# Altium PCB LDO.PcbDoc
Units mm, origin at the board's own origin, x right, y up, seen from the top; angles counter-clockwise.
Board outline 23.49 x 9.53 mm, 2 copper layers (Top Layer, Bottom Layer); 3 components, 3 nets, 8 pads, 10 vias.
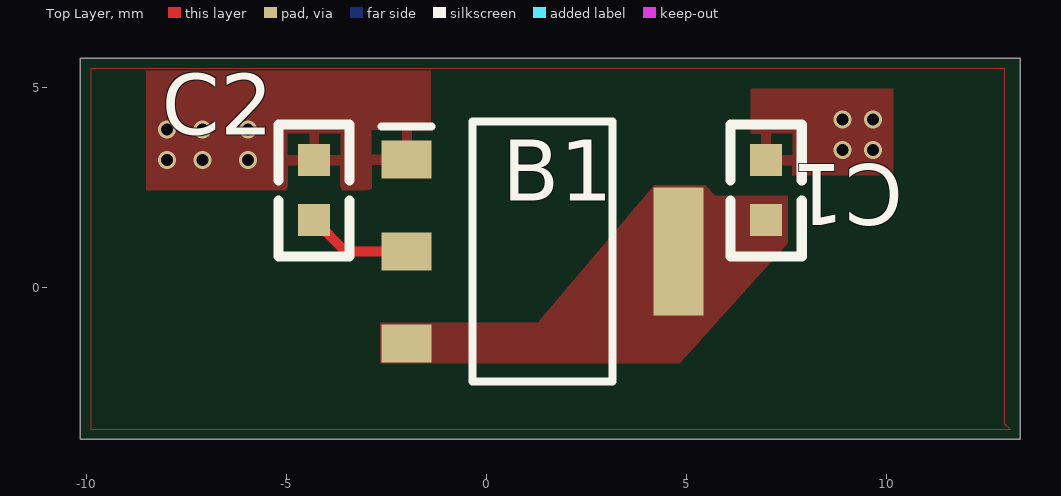
[diagram p0: Top Layer view]
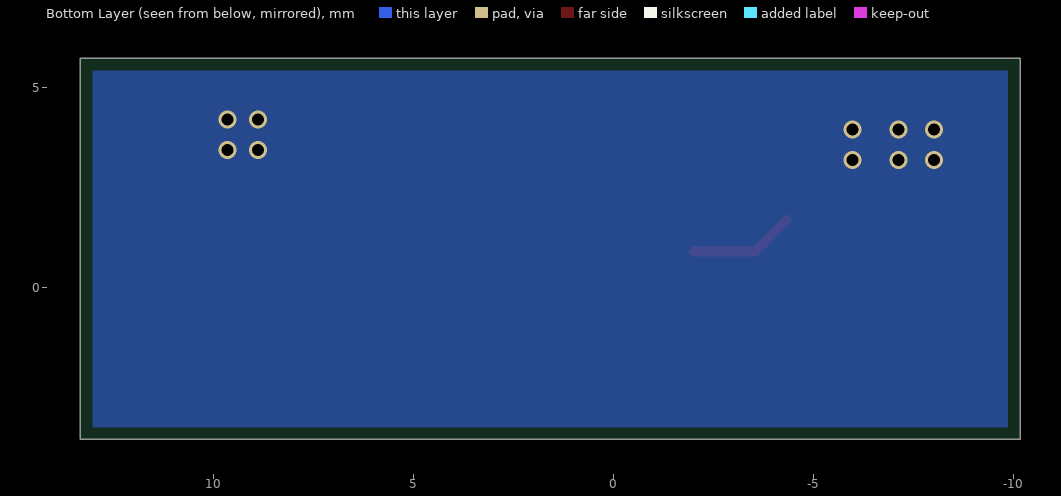
[diagram p1: Bottom Layer view, seen from below]

## Layer stack, top to bottom
Top Solder: solder mask 0.0102, Solder Resist, Dk 3.5
Top Layer: signal copper 0.0356
Dielectric 1: dielectric 0.32, FR-4, Dk 4.8
Bottom Layer: signal copper 0.0356
Bottom Solder: solder mask 0.0102, Solder Resist, Dk 3.5

## Board outline
-10.16,-3.81 -10.16,5.715 13.335,5.715 13.335,-3.81

## Design rules (kind name [scope] priority, off if disabled: settings)
BoardOutlineClearance [All] p1: gap=0.3 ignorepadtopadclearanceinfootprint=FALSE except(0: Arc-SplitContinuation Track-SplitContinuation SMDPad-SplitContinuation THPad-OutlineEdge THPad-CavityEdge THPad-CutoutEdge THPad-SplitBarrior THPad-SplitContinuation Via-OutlineEdge Via-CavityEdge Via-CutoutEdge Via-SplitBarrior Via-SplitContinuation Fill-SplitContinuation Poly-SplitContinuation Region-SplitContinuation Text-SplitContinuation)
Clearance [All] p1: gap=0.254 ignorepadtopadclearanceinfootprint=FALSE except(0: Arc-Hole Track-Hole SMDPad-Hole THPad-Hole Via-Hole Fill-Hole Poly-Hole Region-Hole Text-Hole; 0.127: Arc-Arc Arc-Track Track-Track SMDPad-SMDPad; 0.2: Arc-SMDPad Track-SMDPad; 0.5: SMDPad-THPad THPad-THPad THPad-Via)
HoleSize [All] p1: absolutevalues=TRUE maxlimit=6.3 minlimit=0.3 maxpercent=80.000 minpercent=20.000
HoleToHoleClearance [All] p1: gap=0.6 allowstackedmicrovias=TRUE
MinimumAnnularRing [All] p1: minimumring=0.13
PolygonConnect [All] p1: connectstyle=Relief reliefconductorwidth=0.254 reliefentries=4 polygonreliefangle="90 Angle" airgapwidth=0.254
RoutingCorners [All] p1: cornerstyle=45-Degree minsetback=1.27 maxsetback=1.27
RoutingPriority [Not(InNetClass('Power'))] p1: routingpriority=1
RoutingVias [All] p1: holewidth=0.5 width=1 viastyle="Through Hole" minholewidth=0.3 minwidth=0.5 maxholewidth=1 maxwidth=1.27
SMDNeckDown [All] p1: percent=50.000
SMDToPlane [All] p1: distance=0
SilkToSilkClearance [All] p1: silktosilkclearance=0.127
SilkToSolderMaskClearance [IsPad] p1: minsilkscreentomaskgap=0.15 clearancetoexposedcopper=TRUE
SolderMaskExpansion [All] p1: expansion=0.038 istentingtop=FALSE
UnRoutedNet [All] p1: checkbadconnections=TRUE
ViasUnderSMD [All] p1: allowed=TRUE
Width PowerTraceWidth [InNetClass('Power')] p1: maxlimit=0.384 minlimit=0.254 preferedwidth=0.254
Width [InNetClass('All Nets')] p2: maxlimit=0.384 minlimit=0.127 preferedwidth=0.254
23 further rules are at their usual default settings.

## Components (designator, comment, footprint, x,y, rotation, side; value= is the part's Value field where it differs from the comment)
B1 "NCP1117IST33T3G" SOT230P700X180-4N 1.397,0.889 r0 top
C1 "10uF" 0603_SMD_RC 6.985,3.175 r270 top
C2 "10uF" 0603_SMD_RC -4.318,3.175 r270 top

## Footprints (in the part's own frame and the unit in brackets; to place one, negate y for a bottom-side part, rotate by r counter-clockwise, add the part's x,y. Pads: shape width x height; smd on the part's side, far side on the other; paste and mask are expansions set on the pad)
0603_SMD_RC [mm]
  rect 0.8x0.8 smd: 1(0,0) 2(1.5,0)
  silkscreen extent -0.89,-0.89 2.41,0.89
SOT230P700X180-4N [mm]
  rect 1.25x0.95 smd: 1(-3.4,2.3) 2(-3.4,0) 3(-3.4,-2.3)
  rect 1.25x3.2 smd: 4(3.4,0)
  silkscreen extent -4.03,-3.25 1.75,3.25

## Part data
B1: library part CMP-052-000000-1, "Linear Voltage Regulator IC Positive Fixed 1 Output 1A SOT-223", Manufacturer_Name=onsemi, Mouser Part Number=863-NCP1117IST33T3G, Datasheet Link=https://www.onsemi.com/pdf/datasheet/ncp1117-d.pdf, Design Item ID=NCP1117IST33T3G, Geometry.Height=1.8mm, Manufacturer_Part_Number=NCP1117IST33T3G, Mouser Price/Stock=https://www.mouser.co.uk/ProductDetail/onsemi/NCP1117IST33T3G?qs=iLbezkQI%252BsgWHC6Yi9bFVA%3D%3D, Source=NCP1117IST33T3G.SchLib
C1 C2: library part "SMD 0603 Capacitor", "SMD 0603 Capacitor"

## Via types
v1: diameter 0.45, hole 0.3, Top Layer to Bottom Layer, 10 vias

## Nets (pads, with @x,y where several pads share a name; then routed paths per layer and width w, separated by ;. In a path a pad name is that pad's centre, name@x,y a point inside that pad or via, vN(x,y) a via of type N, cw(c..) or ccw(c..) an arc to the next point about the centre after c; other vN are vias at no path point)
+3.3: B1.2 C2.2 | length 2.6
  Top Layer w0.254: C2.2 -3.532,0.889 B1.2
+5: B1.3 B1.4 C1.2
GND: B1.1 C1.1 C2.1
  other v1: -8.001,3.175 -7.112,3.175 -5.969,3.175 8.89,3.429 9.652,3.429 -8.001,3.937 -7.112,3.937 -5.969,3.937 8.89,4.191 9.652,4.191

## Polygon pours and split planes (outlines as drawn)
GND on Top Layer "GND_L01_P005" (solid, pour order 5): 6.604,2.794 10.16,2.794 10.16,4.953 6.604,4.953
GND on Top Layer "GND_L01_P004" (solid, pour order 4): -1.397,5.715 -8.509,5.715 -8.509,2.413 -1.397,2.413
GND on Top Layer "NONET_L01_P002" (solid, shelved, pour order 2): -9.906,5.461 -9.906,-3.556 13.081,-3.556 12.954,-3.429 12.954,5.461
+5 on Top Layer "+5_L01_P000" (solid, pour order 0): 7.528,2.286 7.528,1.116 7.542,1.102 4.826,-1.905 -2.667,-1.905 -2.667,-0.889 1.27,-0.889 4.191,2.54 5.461,2.54 5.715,2.286
GND on Bottom Layer "GND_L02_P003" (solid, pour order 3): -10.16,-3.81 -10.16,5.715 13.335,5.715 13.335,-3.81

## Silkscreen, mask and mechanical layers (free items; w line width, h text height)
Board Shape:
  the board outline again, w0.254